# Altium PCB Super_Hornet.PcbDoc (part 3 of 4)
Units mil, origin at the board's own origin, x right, y up, seen from the top; angles counter-clockwise.
Board outline 6000 x 4000 mil, 2 copper layers (Top Layer, Bottom Layer); 166 components, 85 nets, 398 pads, 0 vias.
Unrouted connection lines stored in the file: 74.
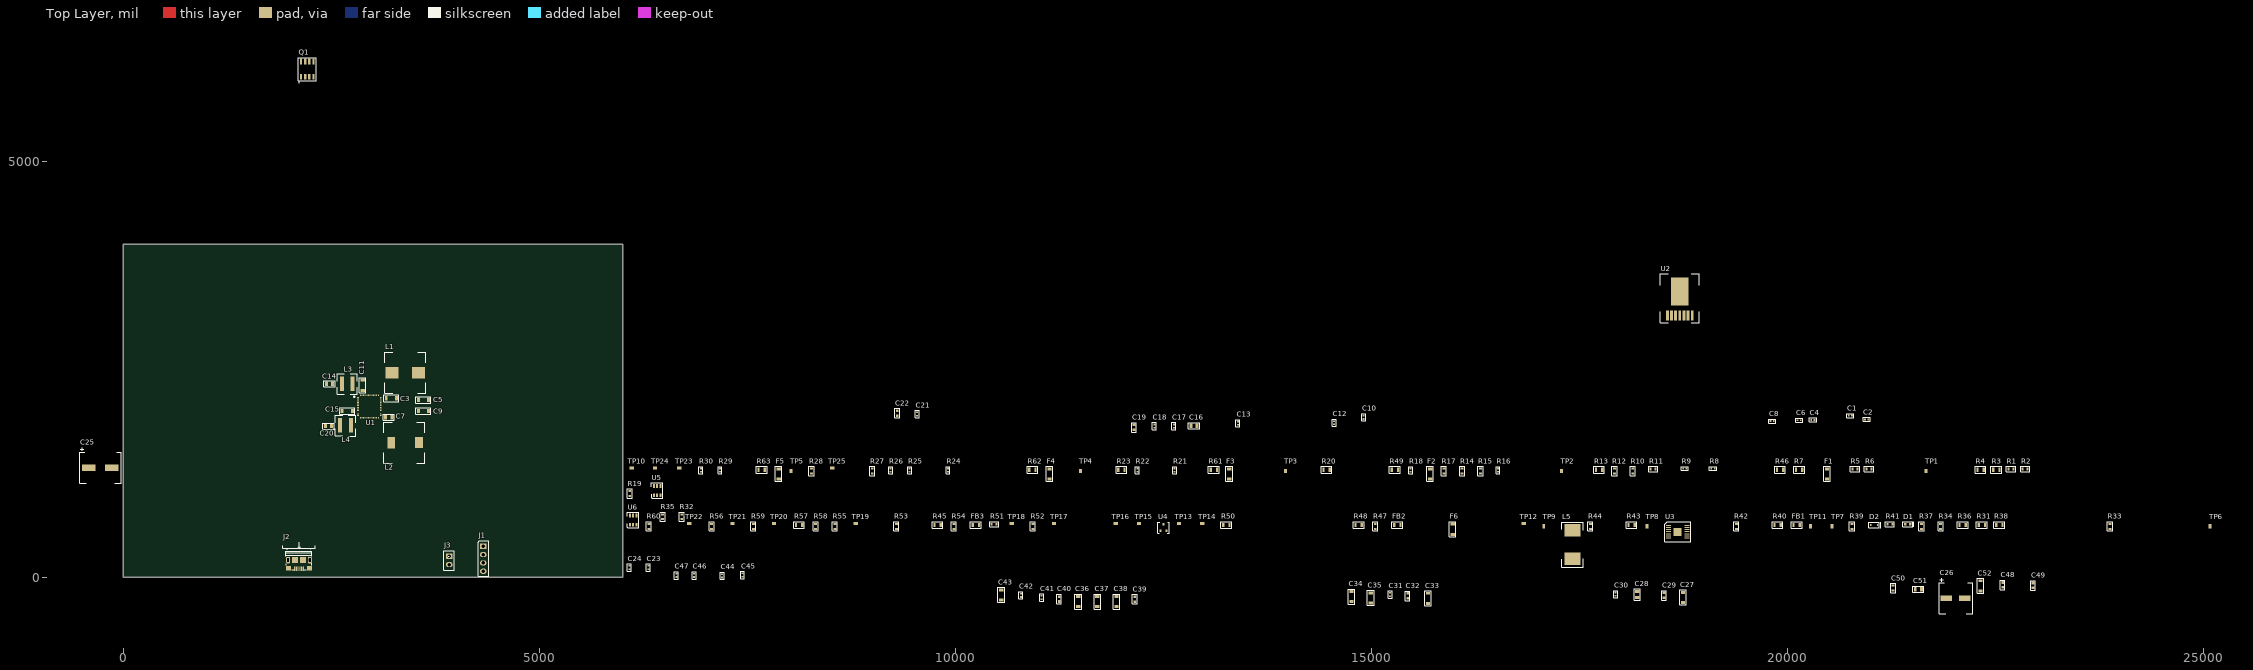
[diagram p0: Top Layer view]

## Part data (continued)
R12: "RES SMD 270 OHM 1% 1/10W 0603", Manufacturer=Panasonic, Rated Power="0.1 W", Resistance=270, Supplier Part Number 1=P270HCT-ND, Temp Coefficient="±100 ppm/°C", Tolerance (%)="±1 %", ComponentLink1Description=http://www.farnell.com/datasheets/1911175.pdf?src-supplier=Farnell, ComponentLink1URL=http://www.farnell.com/datasheets/1911175.pdf?src-supplier=Farnell, ComponentLink2Description=http://industrial.panasonic.com/www-data/pdf/AOA0000/AOA0000CE2.pdf?src-supplier=Avnet, ComponentLink2URL=http://industrial.panasonic.com/www-data/pdf/AOA0000/AOA0000CE2.pdf?src-supplier=Avnet, ComponentLink3Description=http://www.alliedelec.com/m/d/623f45ff1957d936ff56d46fd1c28cac.pdf?src-supplier=Allied+Electronics, ComponentLink3URL=http://www.alliedelec.com/m/d/623f45ff1957d936ff56d46fd1c28cac.pdf?src-supplier=Allied+Electronics, ComponentLink4Description=http://industrial.panasonic.com/www-data/pdf/AOA0000/AOA0000CE2.pdf?src-supplier=Avnet+Europe, ComponentLink4URL=http://industrial.panasonic.com/www-data/pdf/AOA0000/AOA0000CE2.pdf?src-supplier=Avnet+Europe, ComponentLink5Description=http://industrial.panasonic.com/www-data/pdf/AOA0000/AOA0000CE2.pdf?src-supplier=Element14, ComponentLink5URL=http://industrial.panasonic.com/www-data/pdf/AOA0000/AOA0000CE2.pdf?src-supplier=Element14, ComponentLink6Description=http://industrial.panasonic.com/www-data/pdf/AOA0000/AOA0000CE2.pdf?src-supplier=Future+Electronics, ComponentLink6URL=http://industrial.panasonic.com/www-data/pdf/AOA0000/AOA0000CE2.pdf?src-supplier=Future+Electronics, ComponentLink7Description=http://www.farnell.com/datasheets/1911175.pdf?src-supplier=Element14, ComponentLink7URL=http://www.farnell.com/datasheets/1911175.pdf?src-supplier=Element14, ComponentLink8Description=http://industrial.panasonic.com/www-data/pdf/AOA0000/AOA0000CE2.pdf?src-supplier=Avnet+Asia, ComponentLink8URL=http://industrial.panasonic.com/www-data/pdf/AOA0000/AOA0000CE2.pdf?src-supplier=Avnet+Asia, ComponentLink9Description=http://www.farnell.com/datasheets/1678782.pdf?src-supplier=Element14, ComponentLink9URL=http://www.farnell.com/datasheets/1678782.pdf?src-supplier=Element14, Manufacturer Part Number=ERJ-3EKF2700V, Pricing 1="1=0.1, 10=0.059, 100=0.0239, 1000=0.0107, 2500=0.0093 (USD)", Size Code=0603, Stock 1=101068, Supplier 1=Digi-Key
R13: "RES SMD 2.87K OHM 1% 1/8W 0805", Manufacturer=Yageo, Operating Temperature="-55°C ~ 155°C", Package / Case="0805 (2012 Metric)", Power (Watts)="0.125W, 1/8W", Resistance (Ohms)=2.87K, Standard Package=1, Supplier Device Package=0805, Supplier Part Number 1=311-2.87KCRCT-ND, Temperature Coefficient=±100ppm/°C, Tolerance=±1%, Catalog Drawings="Thick Film Resistor Side", Category=Resistors, ComponentLink1Description=http://www.yageo.ru/pdf/RC0805.pdf?src-supplier=Future+Electronics, ComponentLink1URL=http://www.yageo.ru/pdf/RC0805.pdf?src-supplier=Future+Electronics, ComponentLink2Description=http://www.yageo.com.tw/exep/pages/download/literatures/PYu-R_INT-thick_7.pdf?src-supplier=Digi-Key, ComponentLink2URL=http://www.yageo.com.tw/exep/pages/download/literatures/PYu-R_INT-thick_7.pdf?src-supplier=Digi-Key, ComponentLink3Description=http://www.yageo.com/documents/recent/PYu-RC_Group_51_RoHS_L_9.pdf?src-supplier=Digi-Key, ComponentLink3URL=http://www.yageo.com/documents/recent/PYu-RC_Group_51_RoHS_L_9.pdf?src-supplier=Digi-Key, Composition="Thick Film", EDA / CAD Models="Download from Accelerated Designs", Family="Chip Resistor - Surface Mount", Features="Moisture Resistant", Height="0.024\" (0.60mm)", HTML Datasheet="RC Series, L Suffix Datasheet.html", Kits="PHC4A-KIT-ND  - RES KIT 1K-9.76K 1/8W 5700PCS PHC4-KIT-ND  - RES KIT 1K-9.76K 1/8W 22800PCS", Manufacturer Part Number=RC0805FR-072K87L, Number of Terminations=2, Online Catalog="RC0805 Series", Other Names=311-2.87KCRCT, Packaging="Cut Tape (CT)", PCN Other="RC/AC 0603/0805/1206 22/Jan/2013", Pricing 1="1=0.1, 10=0.04, 100=0.0163, 1000=0.0073, 2500=0.0064 (USD)", Product Training Modules="Chip Resistor", Series=RC, Size / Dimension="0.079\" L x 0.049\" W (2.00mm x 1.25mm)", Stock 1=149027, Supplier 1=Digi-Key
R14: "RES SMD 301K OHM 1% 1/10W 0603", Manufacturer=Panasonic, Power Rating=100mW, Resistance=301K, Resistance Tolerance="± 1%", Resistor Case Style="0603 ^1608 Metric]", Resistor Element Type="Thick Film", Supplier Part Number 1=P301KHCT-ND, Temperature Coefficient="± 100ppm/°C", Voltage Rating=75V, ComponentLink1Description=http://www.jameco.com/Jameco/Products/ProdDS/1987951.pdf?src-supplier=Jameco, ComponentLink1URL=http://www.jameco.com/Jameco/Products/ProdDS/1987951.pdf?src-supplier=Jameco, ComponentLink2Description=http://industrial.panasonic.com/www-data/pdf/AOA0000/AOA0000CE2.pdf?src-supplier=Avnet, ComponentLink2URL=http://industrial.panasonic.com/www-data/pdf/AOA0000/AOA0000CE2.pdf?src-supplier=Avnet, ComponentLink3Description=https://www.alliedelec.com/m/d/623f45ff1957d936ff56d46fd1c28cac.pdf?src-supplier=Allied+Electronics, ComponentLink3URL=https://www.alliedelec.com/m/d/623f45ff1957d936ff56d46fd1c28cac.pdf?src-supplier=Allied+Electronics, ComponentLink4Description=http://www.farnell.com/datasheets/426256.pdf?src-supplier=Element14, ComponentLink4URL=http://www.farnell.com/datasheets/426256.pdf?src-supplier=Element14, ComponentLink5Description=http://www.farnell.com/datasheets/1678782.pdf?src-supplier=Element14, ComponentLink5URL=http://www.farnell.com/datasheets/1678782.pdf?src-supplier=Element14, ComponentLink6Description=http://www.farnell.com/datasheets/426256.pdf?src-supplier=Farnell, ComponentLink6URL=http://www.farnell.com/datasheets/426256.pdf?src-supplier=Farnell, ComponentLink7Description=http://www.mouser.com/ds/2/315/AOA0000C283-1093288.pdf?src-supplier=Mouser, ComponentLink7URL=http://www.mouser.com/ds/2/315/AOA0000C283-1093288.pdf?src-supplier=Mouser, Manufacturer Part Number=ERJ-3EKF3013V, Packaging="Full Reel", Pricing 1="1=0.1, 10=0.05, 100=0.0205, 1000=0.0092, 2500=0.008 (USD)", Product Range="PANASONIC - ERJ Series Thick Film Chip Resistors", Stock 1=56159, Supplier 1=Digi-Key, SVHC="To Be Advised"
R16: "RES SMD 73.2K OHM 1% 1/10W 0402", Manufacturer=Panasonic, Power Rating=100mW, Resistance=73.2K, Resistance Tolerance="± 1%", Resistor Case Style="0402 ^1005 Metric]", Resistor Element Type="Thick Film", Supplier Part Number 1=P73.2KLCT-ND, Temperature Coefficient="± 100ppm/°C", Voltage Rating=50V, ComponentLink1Description=https://www.alliedelec.com/m/d/623f45ff1957d936ff56d46fd1c28cac.pdf?src-supplier=Allied+Electronics, ComponentLink1URL=https://www.alliedelec.com/m/d/623f45ff1957d936ff56d46fd1c28cac.pdf?src-supplier=Allied+Electronics, ComponentLink2Description=http://www.mouser.com/ds/2/315/AOA0000CE2-37512.pdf?src-supplier=Mouser, ComponentLink2URL=http://www.mouser.com/ds/2/315/AOA0000CE2-37512.pdf?src-supplier=Mouser, ComponentLink3Description=http://www.farnell.com/datasheets/1678782.pdf?src-supplier=Element14, ComponentLink3URL=http://www.farnell.com/datasheets/1678782.pdf?src-supplier=Element14, ComponentLink4Description=http://www.industrial.panasonic.com/www-data/pdf/AOA0000/AOA0000CE2.pdf?src-supplier=Element14, ComponentLink4URL=http://www.industrial.panasonic.com/www-data/pdf/AOA0000/AOA0000CE2.pdf?src-supplier=Element14, ComponentLink5Description=http://www.farnell.com/datasheets/1911175.pdf?src-supplier=Farnell, ComponentLink5URL=http://www.farnell.com/datasheets/1911175.pdf?src-supplier=Farnell, Manufacturer Part Number=ERJ-2RKF7322X, Packaging="Full Reel", Pricing 1="1=0.1, 10=0.04, 100=0.0164, 1000=0.0074, 2500=0.0064, 5000=0.0053 (USD)", Product Range="PANASONIC - ERJ Series", Stock 1=75939, Supplier 1=Digi-Key, SVHC="To Be Advised"
R18: "RES SMD 13.7K OHM 1% 1/10W 0402", Case Code - in=0402, Case Code - mm=1005, Manufacturer=Panasonic, Operating Temperature Range="- 55 C to + 155 C", Package / Case="0402 (1005 metric)", Power Rating="100 mW", Resistance="13.7 K", Supplier Part Number 1=P13.7KLCT-ND, Temperature Coefficient="100 PPM / C", Tolerance="1 %", Voltage Rating="50 V", Brand=Panasonic, ComponentLink1Description=http://www.farnell.com/datasheets/1678782.pdf?src-supplier=Element14, ComponentLink1URL=http://www.farnell.com/datasheets/1678782.pdf?src-supplier=Element14, ComponentLink2Description=http://www.farnell.com/datasheets/1694929.pdf?src-supplier=Element14, ComponentLink2URL=http://www.farnell.com/datasheets/1694929.pdf?src-supplier=Element14, ComponentLink3Description=https://www.alliedelec.com/m/d/623f45ff1957d936ff56d46fd1c28cac.pdf?src-supplier=Allied+Electronics, ComponentLink3URL=https://www.alliedelec.com/m/d/623f45ff1957d936ff56d46fd1c28cac.pdf?src-supplier=Allied+Electronics, ComponentLink4Description=http://www.farnell.com/datasheets/1678782.pdf?src-supplier=Farnell, ComponentLink4URL=http://www.farnell.com/datasheets/1678782.pdf?src-supplier=Farnell, ComponentLink5Description=http://industrial.panasonic.com/www-data/pdf/AOA0000/AOA0000CE2.pdf?src-supplier=Avnet, ComponentLink5URL=http://industrial.panasonic.com/www-data/pdf/AOA0000/AOA0000CE2.pdf?src-supplier=Avnet, ComponentLink6Description=http://www.mouser.com/ds/2/315/AOA0000C304-1149620.pdf?src-supplier=Mouser, ComponentLink6URL=http://www.mouser.com/ds/2/315/AOA0000C304-1149620.pdf?src-supplier=Mouser, Factory Pack Quantity=10000, Height="0.35 mm", Length="1 mm", Manufacturer Part Number=ERJ-2RKF1372X, Packaging=Reel, Pricing 1="1=0.1, 10=0.043, 100=0.0173, 1000=0.0078, 2500=0.0068, 5000=0.0056 (USD)", Product="Thick Film Resistors SMD", Product Category="Thick Film Resistors", Qualification=AEC-Q200, RoHS=True, Series=ERJ, Stock 1=348733, Supplier 1=Digi-Key, Termination Style=SMD/SMT, Type="Precision Thick Film Resistors SMD", Unit Weight="0.000028 oz", Width="0.5 mm"
R19: "RES SMD 0.01 OHM 1% 1/4W 0603", Manufacturer=Panasonic, Operating Temperature="-55°C ~ 125°C", Package / Case="0603 (1608 Metric)", Power (Watts)="0.25W, 1/4W", Resistance (Ohms)=0.01, Supplier Device Package=0603, Supplier Part Number 1=P19180CT-ND, Temperature Coefficient="0/ +300ppm/°C", Tolerance=±1%, Category=Resistors, ComponentLink1Description=https://industrial.panasonic.com/cdbs/www-data/pdf/RDN0000/AOA0000C313.pdf?src-supplier=Digi-Key, ComponentLink1URL=https://industrial.panasonic.com/cdbs/www-data/pdf/RDN0000/AOA0000C313.pdf?src-supplier=Digi-Key, ComponentLink2Description=http://industrial.panasonic.com/lecs/www-data/pdf/AOA0000/AOA0000CE3.pdf?src-supplier=Digi-Key, ComponentLink2URL=http://industrial.panasonic.com/lecs/www-data/pdf/AOA0000/AOA0000CE3.pdf?src-supplier=Digi-Key, ComponentLink3Description=http://www.mouser.com/ds/2/315/AOA0000C295-1109214.pdf?src-supplier=Mouser, ComponentLink3URL=http://www.mouser.com/ds/2/315/AOA0000C295-1109214.pdf?src-supplier=Mouser, Composition="Thick Film", Family="Chip Resistor - Surface Mount", Features="Automotive AEC-Q200, Current Sense", Height="0.026\" (0.65mm)", Manufacturer Part Number=ERJ-3LWFR010V, Number of Terminations=2, Packaging="Tape & Reel (TR)", Pricing 1="1=0.48, 10=0.371, 100=0.156, 1000=0.0861, 2500=0.0807 (USD)", Series=ERJ, Size / Dimension="0.063\" L x 0.031\" W (1.60mm x 0.80mm)", Stock 1=48216, Supplier 1=Digi-Key
R20: "RES SMD 7.68K OHM 1% 1/8W 0805", Manufacturer=Panasonic, Operating Temperature="-55°C ~ 155°C", Package / Case="0805 (2012 Metric)", Power (Watts)="0.125W, 1/8W", Resistance (Ohms)=7.68K, Standard Package=1, Supplier Device Package=0805, Supplier Part Number 1=P7.68KCCT-ND, Temperature Coefficient=±100ppm/°C, Tolerance=±1%, Category=Resistors, ComponentLink1Description=http://www.mouser.com/ds/2/315/AOA0000C283-1093288.pdf?src-supplier=Mouser, ComponentLink1URL=http://www.mouser.com/ds/2/315/AOA0000C283-1093288.pdf?src-supplier=Mouser, ComponentLink2Description=https://www.alliedelec.com/m/d/623f45ff1957d936ff56d46fd1c28cac.pdf?src-supplier=Allied+Electronics, ComponentLink2URL=https://www.alliedelec.com/m/d/623f45ff1957d936ff56d46fd1c28cac.pdf?src-supplier=Allied+Electronics, ComponentLink3Description=http://www.farnell.com/datasheets/1678782.pdf?src-supplier=Farnell, ComponentLink3URL=http://www.farnell.com/datasheets/1678782.pdf?src-supplier=Farnell, ComponentLink4Description=http://industrial.panasonic.com/www-data/pdf/AOA0000/AOA0000CE2.pdf?src-supplier=Avnet, ComponentLink4URL=http://industrial.panasonic.com/www-data/pdf/AOA0000/AOA0000CE2.pdf?src-supplier=Avnet, ComponentLink5Description=http://www.farnell.com/datasheets/1694929.pdf?src-supplier=Element14, ComponentLink5URL=http://www.farnell.com/datasheets/1694929.pdf?src-supplier=Element14, Composition="Thick Film", EDA / CAD Models="Download from Accelerated Designs", Family="Chip Resistor - Surface Mount", Features="Automotive AEC-Q200", Height="0.028\" (0.70mm)", Kits="RSM3CA-ND  - RES KIT 1K-9.76K 1/8W 4800PCS RSM3C-ND  - RES KIT 1K-9.76K 1/8W 19200PCS", Manufacturer Part Number=ERJ-6ENF7681V, Number of Terminations=2, Online Catalog="ERJ Series", Other Names="ERJ-6ENF7681 ERJ6ENF7681 P7.68KCBK P7.68KCCT", Packaging="Cut Tape (CT)", Pricing 1="1=0.1, 10=0.072, 100=0.0275, 1000=0.0121, 2500=0.0105 (USD)", Series=ERJ, Size / Dimension="0.079\" L x 0.049\" W (2.00mm x 1.25mm)", Stock 1=41002, Supplier 1=Digi-Key
R21: "RES SMD 35.7K OHM 1% 1/10W 0402", Manufacturer=Panasonic, Power Rating=100mW, Resistance=35.7K, Resistance Tolerance="± 1%", Resistor Case Style="0402 [1005 Metric]", Resistor Element Material="Thick Film", Resistor Mounting=SMD, Resistor Terminals=Wraparound, Supplier Part Number 1=P35.7KLCT-ND, Temperature Coefficient="± 100ppm/°C", Voltage Rating=50V, ComponentLink1Description=http://industrial.panasonic.com/www-data/pdf/AOA0000/AOA0000CE2.pdf?src-supplier=Avnet, ComponentLink1URL=http://industrial.panasonic.com/www-data/pdf/AOA0000/AOA0000CE2.pdf?src-supplier=Avnet, ComponentLink2Description=http://www.mouser.com/ds/2/315/AOA0000C86-911473.pdf?src-supplier=Mouser, ComponentLink2URL=http://www.mouser.com/ds/2/315/AOA0000C86-911473.pdf?src-supplier=Mouser, ComponentLink3Description=http://www.industrial.panasonic.com/www-data/pdf/AOA0000/AOA0000CE2.pdf?src-supplier=Element14, ComponentLink3URL=http://www.industrial.panasonic.com/www-data/pdf/AOA0000/AOA0000CE2.pdf?src-supplier=Element14, ComponentLink4Description=https://www.alliedelec.com/m/d/623f45ff1957d936ff56d46fd1c28cac.pdf?src-supplier=Allied+Electronics, ComponentLink4URL=https://www.alliedelec.com/m/d/623f45ff1957d936ff56d46fd1c28cac.pdf?src-supplier=Allied+Electronics, ComponentLink5Description=http://www.farnell.com/datasheets/1694929.pdf?src-supplier=Element14, ComponentLink5URL=http://www.farnell.com/datasheets/1694929.pdf?src-supplier=Element14, Manufacturer Part Number=ERJ-2RKF3572X, MSL="(Not Applicable)", Packaging="Cut Tape", Pricing 1="1=0.1, 10=0.038, 100=0.0153, 1000=0.0069, 2500=0.006, 5000=0.0049 (USD)", Product Range="PANASONIC - ERJ Series", Resistor Element Type="Thick Film", Stock 1=130211, Supplier 1=Digi-Key, SVHC="Diboron trioxide (19-Dec-2012)", SVHC (Secondary)="Lead monoxide (lead oxide) (19-Dec-2012)"
R22 R26: "RES SMD 28.7K OHM 1% 1/16W 0402", Manufacturer=Vishay, Operating Temperature="-55°C ~ 155°C", Package / Case="0402 (1005 Metric)", Power (Watts)="0.063W, 1/16W", Resistance (Ohms)=28.7k, Standard Package=10, Supplier Part Number 1=541-28.7KLCT-ND, Temperature Coefficient=±100ppm/°C, Tolerance=±1%, Category=Resistors, ComponentLink1Description=http://www.farnell.com/datasheets/2111203.pdf?src-supplier=Element14, ComponentLink1URL=http://www.farnell.com/datasheets/2111203.pdf?src-supplier=Element14, ComponentLink2Description=http://uk.rs-online.com/webdocs/0d98/0900766b80d98824.pdf?src-supplier=RSComponents, ComponentLink2URL=http://uk.rs-online.com/webdocs/0d98/0900766b80d98824.pdf?src-supplier=RSComponents, ComponentLink3Description=https://www.alliedelec.com/m/d/0c934d6939ccefa68dbe0b96d821c8cf.pdf?src-supplier=Allied+Electronics, ComponentLink3URL=https://www.alliedelec.com/m/d/0c934d6939ccefa68dbe0b96d821c8cf.pdf?src-supplier=Allied+Electronics, ComponentLink4Description=http://www.farnell.com/datasheets/2045674.pdf?src-supplier=Element14, ComponentLink4URL=http://www.farnell.com/datasheets/2045674.pdf?src-supplier=Element14, ComponentLink5Description=http://www.vishay.com/docs/20035/dcrcwe3.pdf?src-supplier=Digi-Key, ComponentLink5URL=http://www.vishay.com/docs/20035/dcrcwe3.pdf?src-supplier=Digi-Key, ComponentLink6Description=http://www.vishay.com/docs/20035/dcrcwe3.pdf?src-supplier=Avnet+Europe, ComponentLink6URL=http://www.vishay.com/docs/20035/dcrcwe3.pdf?src-supplier=Avnet+Europe, ComponentLink7Description=http://www.farnell.com/datasheets/1697337.pdf?src-supplier=Element14, ComponentLink7URL=http://www.farnell.com/datasheets/1697337.pdf?src-supplier=Element14, ComponentLink8Description=http://www.vishay.com/docs/20035/dcrcwe3.pdf?src-supplier=Future+Electronics, ComponentLink8URL=http://www.vishay.com/docs/20035/dcrcwe3.pdf?src-supplier=Future+Electronics, Composition="Thick Film", EDA / CAD Models="Download from Accelerated Designs", Family="Chip Resistor - Surface Mount", Features="Automotive AEC-Q200", Height="0.016\" (0.40mm)", Kits="541-1418-ND  - RESISTOR KIT 0-1M 1/16W 12200PCS", Manufacturer Part Number=CRCW040228K7FKED, Number of Terminations=2, Online Catalog="CRCW - Automotive Series", Other Names=541-28.7KLCT, Packaging="Cut Tape (CT)", Pricing 1="1=0.1, 10=0.036, 100=0.0146, 1000=0.0066, 2500=0.0057, 5000=0.0047 (USD)", Series=CRCW, Size / Dimension="0.039\" L x 0.020\" W (1.00mm x 0.50mm)", Stock 1=9780, Supplier 1=Digi-Key, Supplier Device Package="0402 (1005 Metric)"
R23: "RES SMD 8.45K OHM 1% 1/8W 0805", Manufacturer=Panasonic, Power Rating=125mW, Resistance=8.45K, Resistance Tolerance="± 1%", Resistor Case Style="0805 ^2012 Metric]", Resistor Element Type="Thick Film", Supplier Part Number 1=P8.45KCCT-ND, Temperature Coefficient="± 100ppm/°C", Voltage Rating=150V, ComponentLink1Description=http://www.mouser.com/ds/2/315/AOA0000CE2-37512.pdf?src-supplier=Mouser, ComponentLink1URL=http://www.mouser.com/ds/2/315/AOA0000CE2-37512.pdf?src-supplier=Mouser, ComponentLink2Description=https://www.alliedelec.com/m/d/623f45ff1957d936ff56d46fd1c28cac.pdf?src-supplier=Allied+Electronics, ComponentLink2URL=https://www.alliedelec.com/m/d/623f45ff1957d936ff56d46fd1c28cac.pdf?src-supplier=Allied+Electronics, ComponentLink3Description=http://components.arrow.com/part/dataview/3985858S182954N1386?src-supplier=Arrow, ComponentLink3URL=http://components.arrow.com/part/dataview/3985858S182954N1386?src-supplier=Arrow, Manufacturer Part Number=ERJ-6ENF8451V, Packaging="Full Reel", Pricing 1="1=0.1, 10=0.072, 100=0.0275, 1000=0.0121, 2500=0.0105 (USD)", Product Range="PANASONIC - ERJ Series", Stock 1=16020, Supplier 1=Digi-Key, SVHC="To Be Advised"
R24: "RES SMD 68.1K OHM 1% 1/10W 0402", Manufacturer=Panasonic, Rated Power="0.1 W", Resistance=68.1K, Supplier Part Number 1=P68.1KLCT-ND, Temp Coefficient="±100 ppm/°C", Tolerance (%)="±1 %", ComponentLink1Description=http://www.farnell.com/datasheets/1678782.pdf?src-supplier=Element14, ComponentLink1URL=http://www.farnell.com/datasheets/1678782.pdf?src-supplier=Element14, ComponentLink2Description=http://industrial.panasonic.com/www-data/pdf/AOA0000/AOA0000CE2.pdf?src-supplier=Avnet, ComponentLink2URL=http://industrial.panasonic.com/www-data/pdf/AOA0000/AOA0000CE2.pdf?src-supplier=Avnet, ComponentLink3Description=https://www.alliedelec.com/m/d/623f45ff1957d936ff56d46fd1c28cac.pdf?src-supplier=Allied+Electronics, ComponentLink3URL=https://www.alliedelec.com/m/d/623f45ff1957d936ff56d46fd1c28cac.pdf?src-supplier=Allied+Electronics, ComponentLink4Description=http://industrial.panasonic.com/www-data/pdf/AOA0000/AOA0000CE2.pdf?src-supplier=Future+Electronics, ComponentLink4URL=http://industrial.panasonic.com/www-data/pdf/AOA0000/AOA0000CE2.pdf?src-supplier=Future+Electronics, ComponentLink5Description=http://www.farnell.com/datasheets/1694929.pdf?src-supplier=Element14, ComponentLink5URL=http://www.farnell.com/datasheets/1694929.pdf?src-supplier=Element14, Manufacturer Part Number=ERJ-2RKF6812X, Pricing 1="1=0.1, 10=0.04, 100=0.0164, 1000=0.0074, 2500=0.0064, 5000=0.0053 (USD)", Size Code=0402, Stock 1=216250, Supplier 1=Digi-Key
R25: "RES SMD 19.6K OHM 1% 1/10W 0402", Manufacturer=Panasonic, Power Rating=100mW, Resistance=19.6K, Resistance Tolerance="± 1%", Resistor Case Style="0402 [1005 Metric]", Resistor Element Material="Thick Film", Resistor Mounting=SMD, Resistor Terminals=Wraparound, Supplier Part Number 1=P19.6KLCT-ND, Temperature Coefficient="± 100ppm/°C", Voltage Rating=50V, ComponentLink1Description=http://www.mouser.com/ds/2/315/AOA0000C283-1093288.pdf?src-supplier=Mouser, ComponentLink1URL=http://www.mouser.com/ds/2/315/AOA0000C283-1093288.pdf?src-supplier=Mouser, ComponentLink2Description=http://industrial.panasonic.com/www-data/pdf/AOA0000/AOA0000CE2.pdf?src-supplier=Avnet, ComponentLink2URL=http://industrial.panasonic.com/www-data/pdf/AOA0000/AOA0000CE2.pdf?src-supplier=Avnet, ComponentLink3Description=https://www.alliedelec.com/m/d/623f45ff1957d936ff56d46fd1c28cac.pdf?src-supplier=Allied+Electronics, ComponentLink3URL=https://www.alliedelec.com/m/d/623f45ff1957d936ff56d46fd1c28cac.pdf?src-supplier=Allied+Electronics, ComponentLink4Description=http://www.farnell.com/datasheets/1911175.pdf?src-supplier=Element14, ComponentLink4URL=http://www.farnell.com/datasheets/1911175.pdf?src-supplier=Element14, ComponentLink5Description=http://www.farnell.com/datasheets/1694929.pdf?src-supplier=Element14, ComponentLink5URL=http://www.farnell.com/datasheets/1694929.pdf?src-supplier=Element14, ComponentLink6Description=http://www.farnell.com/datasheets/1911175.pdf?src-supplier=Farnell, ComponentLink6URL=http://www.farnell.com/datasheets/1911175.pdf?src-supplier=Farnell, Manufacturer Part Number=ERJ-2RKF1962X, MSL="(Not Applicable)", Packaging="Cut Tape", Pricing 1="1=0.1, 10=0.044, 100=0.018, 1000=0.0081, 2500=0.007, 5000=0.0058 (USD)", Product Range="PANASONIC - ERJ Series", Resistor Element Type="Thick Film", Stock 1=262661, Supplier 1=Digi-Key, SVHC="Diboron trioxide (19-Dec-2012)", SVHC (Secondary)="Lead monoxide (lead oxide) (19-Dec-2012)"
R29: "RES SMD 60.4K OHM 1% 1/10W 0402", Manufacturer=Panasonic, Power Rating=63mW, Resistance=60.4K, Resistance Tolerance="± 1%", Resistor Case Style="0402 ^1005 Metric]", Resistor Element Type="Thick Film", Supplier Part Number 1=P60.4KLCT-ND, Temperature Coefficient="± 100ppm/°C", Voltage Rating=50V, ComponentLink1Description=http://www.farnell.com/datasheets/1911175.pdf?src-supplier=Farnell, ComponentLink1URL=http://www.farnell.com/datasheets/1911175.pdf?src-supplier=Farnell, ComponentLink2Description=http://industrial.panasonic.com/www-data/pdf/AOA0000/AOA0000CE2.pdf?src-supplier=Avnet, ComponentLink2URL=http://industrial.panasonic.com/www-data/pdf/AOA0000/AOA0000CE2.pdf?src-supplier=Avnet, ComponentLink3Description=http://industrial.panasonic.com/www-data/pdf/AOA0000/AOA0000CE2.pdf?src-supplier=Avnet+Asia, ComponentLink3URL=http://industrial.panasonic.com/www-data/pdf/AOA0000/AOA0000CE2.pdf?src-supplier=Avnet+Asia, ComponentLink4Description=https://www.alliedelec.com/m/d/623f45ff1957d936ff56d46fd1c28cac.pdf?src-supplier=Allied+Electronics, ComponentLink4URL=https://www.alliedelec.com/m/d/623f45ff1957d936ff56d46fd1c28cac.pdf?src-supplier=Allied+Electronics, ComponentLink5Description=http://www.farnell.com/datasheets/1678782.pdf?src-supplier=Element14, ComponentLink5URL=http://www.farnell.com/datasheets/1678782.pdf?src-supplier=Element14, ComponentLink6Description=http://www.mouser.com/ds/2/315/AOA0000C283-1093288.pdf?src-supplier=Mouser, ComponentLink6URL=http://www.mouser.com/ds/2/315/AOA0000C283-1093288.pdf?src-supplier=Mouser, ComponentLink7Description=http://www.farnell.com/datasheets/1911175.pdf?src-supplier=Element14, ComponentLink7URL=http://www.farnell.com/datasheets/1911175.pdf?src-supplier=Element14, ComponentLink8Description=http://industrial.panasonic.com/cdbs/www-data/pdf/RDA0000/AOA0000C304.pdf?src-supplier=Farnell, ComponentLink8URL=http://industrial.panasonic.com/cdbs/www-data/pdf/RDA0000/AOA0000C304.pdf?src-supplier=Farnell, Manufacturer Part Number=ERJ-2RKF6042X, Packaging="Full Reel", Pricing 1="1=0.1, 10=0.04, 100=0.0163, 1000=0.0073, 2500=0.0064, 5000=0.0053 (USD)", Product Range="PANASONIC - ERJ Series Thick Film Chip Resistors", Stock 1=597601, Supplier 1=Digi-Key, SVHC="To Be Advised"
R30: "RES SMD 23.2K OHM 1% 1/10W 0402", Manufacturer=Panasonic, Operating Temperature="-55°C ~ 155°C", Package / Case="0402 (1005 Metric)", Power (Watts)="0.1W, 1/10W", Resistance (Ohms)=23.2k, Standard Package=1, Supplier Device Package=0402, Supplier Part Number 1=P23.2KLCT-ND, Temperature Coefficient=±100ppm/°C, Tolerance=±1%, Category=Resistors, ComponentLink1Description=https://www.alliedelec.com/m/d/623f45ff1957d936ff56d46fd1c28cac.pdf?src-supplier=Allied+Electronics, ComponentLink1URL=https://www.alliedelec.com/m/d/623f45ff1957d936ff56d46fd1c28cac.pdf?src-supplier=Allied+Electronics, ComponentLink2Description=http://www.farnell.com/datasheets/1911175.pdf?src-supplier=Farnell, ComponentLink2URL=http://www.farnell.com/datasheets/1911175.pdf?src-supplier=Farnell, ComponentLink3Description=http://www.farnell.com/datasheets/1678782.pdf?src-supplier=Element14, ComponentLink3URL=http://www.farnell.com/datasheets/1678782.pdf?src-supplier=Element14, ComponentLink4Description=http://www.mouser.com/ds/2/315/AOA0000C283-1093288.pdf?src-supplier=Mouser, ComponentLink4URL=http://www.mouser.com/ds/2/315/AOA0000C283-1093288.pdf?src-supplier=Mouser, Composition="Thick Film", EDA / CAD Models="Download from Accelerated Designs", Family="Chip Resistor - Surface Mount", Features="Automotive AEC-Q200", Height="0.016\" (0.40mm)", Kits="RSM4L-ND  - RES KIT 10K-97.6K 1/10W 4800PCS", Manufacturer Part Number=ERJ-2RKF2322X, Number of Terminations=2, Online Catalog="ERJ Series", Other Names="ERJ-2RKF2322 ERJ2RKF2322 P23.2KLCT", Packaging="Cut Tape (CT)", Pricing 1="1=0.1, 10=0.047, 100=0.0192, 1000=0.0086, 2500=0.0075, 5000=0.0062 (USD)", Series=ERJ, Size / Dimension="0.039\" L x 0.020\" W (1.00mm x 0.50mm)", Stock 1=325477, Supplier 1=Digi-Key
R31 R40 R43 R45 R46 R48 R49 R50 R61 R62 R63: "RES SMD 0 OHM JUMPER 1/8W 0805", Case Size="0805 (2012 Metric)", Manufacturer=Panasonic, Operating Temp Range="-55 to +155 °C", Rated Current="2 A", Rated Power="0.125 W", Resistance="0 O", Supplier Part Number 1=P0.0ACT-ND, ComponentLink1Description=http://www.farnell.com/datasheets/1678796.pdf?src-supplier=Element14, ComponentLink1URL=http://www.farnell.com/datasheets/1678796.pdf?src-supplier=Element14, ComponentLink2Description=http://industrial.panasonic.com/cdbs/www-data/pdf/RDA0000/AOA0000C301.pdf?src-supplier=Farnell, ComponentLink2URL=http://industrial.panasonic.com/cdbs/www-data/pdf/RDA0000/AOA0000C301.pdf?src-supplier=Farnell, ComponentLink3Description=http://industrial.panasonic.com/www-data/pdf/AOA0000/AOA0000CE1.pdf?src-supplier=Avnet, ComponentLink3URL=http://industrial.panasonic.com/www-data/pdf/AOA0000/AOA0000CE1.pdf?src-supplier=Avnet, ComponentLink4Description=http://industrial.panasonic.com/www-cgi/jvcr13pz.cgi?E+PZ+3+AOA0001+ERJ6GEY0R00V+7+WW?src-supplier=Jameco, ComponentLink4URL=http://industrial.panasonic.com/www-cgi/jvcr13pz.cgi?E+PZ+3+AOA0001+ERJ6GEY0R00V+7+WW?src-supplier=Jameco, ComponentLink5Description=http://industrial.panasonic.com/www-data/pdf/AOA0000/AOA0000CE1.pdf?src-supplier=Avnet+Europe, ComponentLink5URL=http://industrial.panasonic.com/www-data/pdf/AOA0000/AOA0000CE1.pdf?src-supplier=Avnet+Europe, ComponentLink6Description=http://industrial.panasonic.com/www-data/pdf/AOA0000/AOA0000CE1.pdf?src-supplier=Avnet+Asia, ComponentLink6URL=http://industrial.panasonic.com/www-data/pdf/AOA0000/AOA0000CE1.pdf?src-supplier=Avnet+Asia, Dimension="2 x 1.25 mm", Height - Max="0.7 mm", Manufacturer Part Number=ERJ-6GEY0R00V, No. of Terminations=2, Pricing 1="1=0.1, 10=0.054, 25=0.0392, 50=0.03, 100=0.0221, 250=0.0168, 500=0.0135, 1000=0.0099 (USD)", Stock 1=1318594, Supplier 1=Digi-Key, Technology="Thick Film"
R32: "RES SMD 42.2K OHM 1% 1/10W 0603", Manufacturer=Panasonic, Operating Temperature="-55°C ~ 155°C", Package / Case="0603 (1608 Metric)", Power (Watts)="0.1W, 1/10W", Resistance (Ohms)=42.2K, Standard Package=1, Supplier Device Package=0603, Supplier Part Number 1=P42.2KHCT-ND, Temperature Coefficient=±100ppm/°C, Tolerance=±1%, Category=Resistors, ComponentLink1Description=http://www.farnell.com/datasheets/1678782.pdf?src-supplier=Element14, ComponentLink1URL=http://www.farnell.com/datasheets/1678782.pdf?src-supplier=Element14, ComponentLink2Description=http://www.farnell.com/datasheets/1911175.pdf?src-supplier=Farnell, ComponentLink2URL=http://www.farnell.com/datasheets/1911175.pdf?src-supplier=Farnell, ComponentLink3Description=http://industrial.panasonic.com/www-data/pdf/AOA0000/AOA0000CE2.pdf?src-supplier=Avnet+Europe, ComponentLink3URL=http://industrial.panasonic.com/www-data/pdf/AOA0000/AOA0000CE2.pdf?src-supplier=Avnet+Europe, ComponentLink4Description=https://www.alliedelec.com/m/d/623f45ff1957d936ff56d46fd1c28cac.pdf?src-supplier=Allied+Electronics, ComponentLink4URL=https://www.alliedelec.com/m/d/623f45ff1957d936ff56d46fd1c28cac.pdf?src-supplier=Allied+Electronics, ComponentLink5Description=http://industrial.panasonic.com/www-data/pdf/AOA0000/AOA0000CE2.pdf?src-supplier=Avnet+Asia, ComponentLink5URL=http://industrial.panasonic.com/www-data/pdf/AOA0000/AOA0000CE2.pdf?src-supplier=Avnet+Asia, ComponentLink6Description=http://industrial.panasonic.com/www-data/pdf/AOA0000/AOA0000CE2.pdf?src-supplier=Avnet, ComponentLink6URL=http://industrial.panasonic.com/www-data/pdf/AOA0000/AOA0000CE2.pdf?src-supplier=Avnet, ComponentLink7Description=http://www.mouser.com/ds/2/315/AOA0000C283-1093288.pdf?src-supplier=Mouser, ComponentLink7URL=http://www.mouser.com/ds/2/315/AOA0000C283-1093288.pdf?src-supplier=Mouser, ComponentLink8Description=http://www.farnell.com/datasheets/426256.pdf?src-supplier=Element14, ComponentLink8URL=http://www.farnell.com/datasheets/426256.pdf?src-supplier=Element14, Composition="Thick Film", EDA / CAD Models="Download from Accelerated Designs", Family="Chip Resistor - Surface Mount", Features="Automotive AEC-Q200", Height="0.022\" (0.55mm)", Kits="RSM4H-ND  - RES KIT 10K-97.6K 1/10W 4800PCS", Manufacturer Part Number=ERJ-3EKF4222V, Number of Terminations=2, Online Catalog="ERJ Series", Other Names="ERJ-3EKF4222 ERJ3EKF4222 P42.2KHCT", Packaging="Cut Tape (CT)", Pricing 1="1=0.1, 10=0.032, 100=0.013, 1000=0.0058, 2500=0.0051 (USD)", Series=ERJ, Size / Dimension="0.063\" L x 0.031\" W (1.60mm x 0.80mm)", Stock 1=6649, Supplier 1=Digi-Key
R33: "RES SMD 1K OHM 0.1% 1/10W 0603", Manufacturer=Panasonic, Operating Temperature Max=155°C, Operating Temperature Min=-55°C, Operating Temperature Range="-55°C to +155°C", Package / Case=0603, Power Rating=100mW, Resistance=1K, Resistance Tolerance="± 0.1%", Resistor Case Style="0603 [1608 Metric]", Resistor Element Material="Thin Film", Resistor Mounting=SMD, Supplier Part Number 1=P1.0KDBCT-ND, Temperature Coefficient="± 25ppm/°C", Voltage Rating=75V, ComponentLink1Description=http://uk.rs-online.com/webdocs/148c/0900766b8148c48a.pdf?src-supplier=RSComponents, ComponentLink1URL=http://uk.rs-online.com/webdocs/148c/0900766b8148c48a.pdf?src-supplier=RSComponents, ComponentLink2Description=https://industrial.panasonic.com/cdbs/www-data/pdf/RDM0000/AOA0000C307.pdf?src-supplier=Mouser, ComponentLink2URL=https://industrial.panasonic.com/cdbs/www-data/pdf/RDM0000/AOA0000C307.pdf?src-supplier=Mouser, ComponentLink3Description=https://industrial.panasonic.com/cdbs/www-data/pdf/RDM0000/AOA0000C307.pdf?src-supplier=Distrelec, ComponentLink3URL=https://industrial.panasonic.com/cdbs/www-data/pdf/RDM0000/AOA0000C307.pdf?src-supplier=Distrelec, ComponentLink4Description=http://www.alliedelec.com/m/d/b6b0537e86f421aa7f5975bb1d8f429a.pdf?src-supplier=Allied+Electronics, ComponentLink4URL=http://www.alliedelec.com/m/d/b6b0537e86f421aa7f5975bb1d8f429a.pdf?src-supplier=Allied+Electronics, ComponentLink5Description=http://www.farnell.com/datasheets/2059650.pdf?src-supplier=Element14, ComponentLink5URL=http://www.farnell.com/datasheets/2059650.pdf?src-supplier=Element14, ComponentLink6Description=http://www.farnell.com/datasheets/485442.pdf?src-supplier=Element14, ComponentLink6URL=http://www.farnell.com/datasheets/485442.pdf?src-supplier=Element14, ComponentLink7Description=http://industrial.panasonic.com/www-data/pdf/AOA0000/AOA0000CE26.pdf?src-supplier=Future+Electronics, ComponentLink7URL=http://industrial.panasonic.com/www-data/pdf/AOA0000/AOA0000CE26.pdf?src-supplier=Future+Electronics, ComponentLink8Description=http://www.farnell.com/datasheets/2052875.pdf?src-supplier=Farnell, ComponentLink8URL=http://www.farnell.com/datasheets/2052875.pdf?src-supplier=Farnell, ComponentLink9Description=https://industrial.panasonic.com/cdbs/www-data/pdf/RDM0000/AOA0000C307.pdf?src-supplier=Avnet, ComponentLink9URL=https://industrial.panasonic.com/cdbs/www-data/pdf/RDM0000/AOA0000C307.pdf?src-supplier=Avnet, ComponentLink10Description=http://www.farnell.com/datasheets/485442.pdf?src-supplier=Farnell, ComponentLink10URL=http://www.farnell.com/datasheets/485442.pdf?src-supplier=Farnell, ComponentLink11Description=http://industrial.panasonic.com/www-data/pdf/AOA0000/AOA0000CE26.pdf?src-supplier=Avnet+Europe, ComponentLink11URL=http://industrial.panasonic.com/www-data/pdf/AOA0000/AOA0000CE26.pdf?src-supplier=Avnet+Europe, ComponentLink12Description=http://www.produktinfo.conrad.com/datenblaetter/450000-474999/450752-da-01-en-WIDERSTAND_0603_ERA.pdf?src-supplier=Conrad, ComponentLink12URL=http://www.produktinfo.conrad.com/datenblaetter/450000-474999/450752-da-01-en-WIDERSTAND_0603_ERA.pdf?src-supplier=Conrad, Manufacturer Part Number=ERA-3AEB102V, No. of Pins=2, Packaging=Reel, Pricing 1="1=0.34, 10=0.286, 100=0.1116, 1000=0.0467, 2500=0.0428 (USD)", Product Range="PANASONIC - ERA Series Metal Film Chip Resistor", Reel Quantity=5000, Resistor Element Type="Thin Film", Series=ERA, Stock 1=455914, Supplier 1=Digi-Key, SVHC="No SVHC (16-Jun-2014)"
R34 R59 R60: "RES SMD 100 OHM 1% 1/10W 0603", Manufacturer=Panasonic, Rated Power="0.1 W", Resistance=100, Supplier Part Number 1=P100HCT-ND, Temp Coefficient="±100 ppm/°C", Tolerance (%)="±1 %", ComponentLink1Description=http://industrial.panasonic.com/www-data/pdf/AOA0000/AOA0000CE2.pdf?src-supplier=Avnet, ComponentLink1URL=http://industrial.panasonic.com/www-data/pdf/AOA0000/AOA0000CE2.pdf?src-supplier=Avnet, ComponentLink2Description=http://www.alliedelec.com/m/d/623f45ff1957d936ff56d46fd1c28cac.pdf?src-supplier=Allied+Electronics, ComponentLink2URL=http://www.alliedelec.com/m/d/623f45ff1957d936ff56d46fd1c28cac.pdf?src-supplier=Allied+Electronics, ComponentLink3Description=http://industrial.panasonic.com/cdbs/www-data/pdf/RDA0000/AOA0000C304.pdf?src-supplier=Element14, ComponentLink3URL=http://industrial.panasonic.com/cdbs/www-data/pdf/RDA0000/AOA0000C304.pdf?src-supplier=Element14, ComponentLink4Description=http://industrial.panasonic.com/www-data/pdf/AOA0000/AOA0000CE2.pdf?src-supplier=Element14, ComponentLink4URL=http://industrial.panasonic.com/www-data/pdf/AOA0000/AOA0000CE2.pdf?src-supplier=Element14, ComponentLink5Description=http://www.mouser.com/ds/2/315/AOA0000C86-911473.pdf?src-supplier=Mouser, ComponentLink5URL=http://www.mouser.com/ds/2/315/AOA0000C86-911473.pdf?src-supplier=Mouser, ComponentLink6Description=http://www.jameco.com/Jameco/Products/ProdDS/1987450.pdf?src-supplier=Jameco, ComponentLink6URL=http://www.jameco.com/Jameco/Products/ProdDS/1987450.pdf?src-supplier=Jameco, ComponentLink7Description=http://industrial.panasonic.com/www-data/pdf/AOA0000/AOA0000CE2.pdf?src-supplier=Avnet+Europe, ComponentLink7URL=http://industrial.panasonic.com/www-data/pdf/AOA0000/AOA0000CE2.pdf?src-supplier=Avnet+Europe, ComponentLink8Description=http://www.farnell.com/datasheets/1678782.pdf?src-supplier=Element14, ComponentLink8URL=http://www.farnell.com/datasheets/1678782.pdf?src-supplier=Element14, Manufacturer Part Number=ERJ3EKF1000V, Pricing 1="1=0.1, 10=0.065, 100=0.0266, 1000=0.0119, 2500=0.0104 (USD)", Size Code=0603, Stock 1=1061558, Supplier 1=Digi-Key
R35: "RES SMD 12.7K OHM 1% 1/10W 0603", Manufacturer=Panasonic, Rated Power="0.1 W", Resistance=12.7K, Supplier Part Number 1=P12.7KHCT-ND, Temp Coefficient="±100 ppm/°C", Tolerance (%)="±1 %", ComponentLink1Description=http://www.farnell.com/datasheets/1678782.pdf?src-supplier=Element14, ComponentLink1URL=http://www.farnell.com/datasheets/1678782.pdf?src-supplier=Element14, ComponentLink2Description=http://www.farnell.com/datasheets/426256.pdf?src-supplier=Element14, ComponentLink2URL=http://www.farnell.com/datasheets/426256.pdf?src-supplier=Element14, ComponentLink3Description=http://www.alliedelec.com/m/d/623f45ff1957d936ff56d46fd1c28cac.pdf?src-supplier=Allied+Electronics, ComponentLink3URL=http://www.alliedelec.com/m/d/623f45ff1957d936ff56d46fd1c28cac.pdf?src-supplier=Allied+Electronics, ComponentLink4Description=http://industrial.panasonic.com/www-data/pdf/AOA0000/AOA0000CE2.pdf?src-supplier=Avnet, ComponentLink4URL=http://industrial.panasonic.com/www-data/pdf/AOA0000/AOA0000CE2.pdf?src-supplier=Avnet, Manufacturer Part Number=ERJ-3EKF1272V, Pricing 1="1=0.1, 10=0.032, 100=0.013, 1000=0.0058, 2500=0.0051 (USD)", Size Code=0603, Stock 1=278983, Supplier 1=Digi-Key
R36: "RES SMD 1.07K OHM 1% 1/8W 0805", Manufacturer=Panasonic, Operating Temperature="-55°C ~ 155°C", Package / Case="0805 (2012 Metric)", Power (Watts)="0.125W, 1/8W", Resistance (Ohms)=1.07K, Standard Package=1, Supplier Device Package=0805, Supplier Part Number 1=P1.07KCCT-ND, Temperature Coefficient=±100ppm/°C, Tolerance=±1%, Category=Resistors, ComponentLink1Description=http://industrial.panasonic.com/www-data/pdf/AOA0000/AOA0000CE2.pdf?src-supplier=Avnet, ComponentLink1URL=http://industrial.panasonic.com/www-data/pdf/AOA0000/AOA0000CE2.pdf?src-supplier=Avnet, ComponentLink2Description=http://www.mouser.com/ds/2/315/AOA0000C283-1093288.pdf?src-supplier=Mouser, ComponentLink2URL=http://www.mouser.com/ds/2/315/AOA0000C283-1093288.pdf?src-supplier=Mouser, Composition="Thick Film", EDA / CAD Models="Download from Accelerated Designs", Family="Chip Resistor - Surface Mount", Features="Automotive AEC-Q200", Height="0.028\" (0.70mm)", Kits="RSM3CA-ND  - RES KIT 1K-9.76K 1/8W 4800PCS RSM3C-ND  - RES KIT 1K-9.76K 1/8W 19200PCS", Manufacturer Part Number=ERJ-6ENF1071V, Number of Terminations=2, Online Catalog="ERJ Series", Other Names="ERJ-6ENF1071 ERJ6ENF1071 P1.07KCBK P1.07KCCT", Packaging="Cut Tape (CT)", Pricing 1="1=0.1, 10=0.072, 100=0.0275, 1000=0.0121, 2500=0.0105 (USD)", Series=ERJ, Size / Dimension="0.079\" L x 0.049\" W (2.00mm x 1.25mm)", Stock 1=40812, Supplier 1=Digi-Key
R37: library part ERJ-3LWFR005V, Manufacturer=Panasonic, Operating Temperature="-55°C ~ 125°C", Package / Case="0603 (1608 Metric)", Power (Watts)="0.25W, 1/4W", Resistance (Ohms)=0.005, Supplier Device Package=0603, Supplier Part Number 1=P19182CT-ND, Temperature Coefficient="0/ +700ppm/°C", Tolerance=±1%, Category=Resistors, ComponentLink1Description=http://www.mouser.com/ds/2/315/AOA0000C295-1109214.pdf?src-supplier=Mouser, ComponentLink1URL=http://www.mouser.com/ds/2/315/AOA0000C295-1109214.pdf?src-supplier=Mouser, ComponentLink2Description=https://industrial.panasonic.com/cdbs/www-data/pdf/RDN0000/AOA0000C313.pdf?src-supplier=Digi-Key, ComponentLink2URL=https://industrial.panasonic.com/cdbs/www-data/pdf/RDN0000/AOA0000C313.pdf?src-supplier=Digi-Key, ComponentLink3Description=http://www.farnell.com/datasheets/2631545.pdf?src-supplier=Farnell, ComponentLink3URL=http://www.farnell.com/datasheets/2631545.pdf?src-supplier=Farnell, ComponentLink4Description=http://www.farnell.com/datasheets/2631545.pdf?src-supplier=Newark, ComponentLink4URL=http://www.farnell.com/datasheets/2631545.pdf?src-supplier=Newark, Composition="Thick Film", Family="Chip Resistor - Surface Mount", Features="Automotive AEC-Q200, Current Sense", Height="0.026\" (0.65mm)", Manufacturer Part Number=ERJ-3LWFR005V, Number of Terminations=2, Packaging="Tape & Reel (TR)", Pricing 1="1=0.51, 10=0.39, 25=0.2964, 50=0.2202, 100=0.1638, 250=0.1384, 500=0.1186, 1000=0.0904 (USD)", Series=ERJ, Size / Dimension="0.063\" L x 0.031\" W (1.60mm x 0.80mm)", Stock 1=76322, Supplier 1=Digi-Key
R38: "RES SMD 5.62K OHM 1% 1/8W 0805", Manufacturer=Panasonic, Power Rating=125mW, Resistance=5.62K, Resistance Tolerance="± 1%", Resistor Case Style="0805 [2012 Metric]", Resistor Element Material="Thick Film", Resistor Mounting=SMD, Supplier Part Number 1=P5.62KCCT-ND, Temperature Coefficient="± 100ppm/°C", Voltage Rating=150V, ComponentLink1Description=http://industrial.panasonic.com/www-data/pdf/AOA0000/AOA0000CE2.pdf?src-supplier=Avnet, ComponentLink1URL=http://industrial.panasonic.com/www-data/pdf/AOA0000/AOA0000CE2.pdf?src-supplier=Avnet, ComponentLink2Description=http://www.farnell.com/datasheets/426256.pdf?src-supplier=Element14, ComponentLink2URL=http://www.farnell.com/datasheets/426256.pdf?src-supplier=Element14, ComponentLink3Description=http://www.farnell.com/datasheets/1911175.pdf?src-supplier=Farnell, ComponentLink3URL=http://www.farnell.com/datasheets/1911175.pdf?src-supplier=Farnell, ComponentLink4Description=http://industrial.panasonic.com/www-data/pdf/AOA0000/AOA0000CE2.pdf?src-supplier=Avnet+Europe, ComponentLink4URL=http://industrial.panasonic.com/www-data/pdf/AOA0000/AOA0000CE2.pdf?src-supplier=Avnet+Europe, ComponentLink5Description=http://www.farnell.com/datasheets/1678782.pdf?src-supplier=Element14, ComponentLink5URL=http://www.farnell.com/datasheets/1678782.pdf?src-supplier=Element14, Manufacturer Part Number=ERJ-6ENF5621V, MSL="(Not Applicable)", Packaging="Cut Tape", Pricing 1="1=0.1, 10=0.072, 100=0.0275, 1000=0.0121, 2500=0.0105 (USD)", Product Range="PANASONIC - ERJ Series", Resistor Element Type="Thick Film", Stock 1=24844, Supplier 1=Digi-Key, SVHC="Diboron trioxide (19-Dec-2012)", SVHC (Secondary)="Lead monoxide (lead oxide) (19-Dec-2012)"
R39: "RES SMD 22.1K OHM 1% 1/10W 0603", Manufacturer=Panasonic, Rated Power="0.1 W", Resistance="22.1 K", Supplier Part Number 1=P22.1KHCT-ND, Temp Coefficient="±100 ppm/°C", Tolerance (%)="±1 %", ComponentLink1Description=http://industrial.panasonic.com/cdbs/www-data/pdf/RDA0000/AOA0000C304.pdf?src-supplier=Farnell, ComponentLink1URL=http://industrial.panasonic.com/cdbs/www-data/pdf/RDA0000/AOA0000C304.pdf?src-supplier=Farnell, ComponentLink2Description=http://www.mouser.com/ds/2/315/AOA0000C283-1093288.pdf?src-supplier=Mouser, ComponentLink2URL=http://www.mouser.com/ds/2/315/AOA0000C283-1093288.pdf?src-supplier=Mouser, ComponentLink3Description=http://www.farnell.com/datasheets/1678782.pdf?src-supplier=Element14, ComponentLink3URL=http://www.farnell.com/datasheets/1678782.pdf?src-supplier=Element14, ComponentLink4Description=http://industrial.panasonic.com/www-data/pdf/AOA0000/AOA0000CE2.pdf?src-supplier=Future+Electronics, ComponentLink4URL=http://industrial.panasonic.com/www-data/pdf/AOA0000/AOA0000CE2.pdf?src-supplier=Future+Electronics, ComponentLink5Description=http://industrial.panasonic.com/www-data/pdf/AOA0000/AOA0000CE2.pdf?src-supplier=Avnet+Europe, ComponentLink5URL=http://industrial.panasonic.com/www-data/pdf/AOA0000/AOA0000CE2.pdf?src-supplier=Avnet+Europe, ComponentLink6Description=http://industrial.panasonic.com/www-data/pdf/AOA0000/AOA0000CE2.pdf?src-supplier=Avnet, ComponentLink6URL=http://industrial.panasonic.com/www-data/pdf/AOA0000/AOA0000CE2.pdf?src-supplier=Avnet, ComponentLink7Description=https://www.alliedelec.com/m/d/623f45ff1957d936ff56d46fd1c28cac.pdf?src-supplier=Allied+Electronics, ComponentLink7URL=https://www.alliedelec.com/m/d/623f45ff1957d936ff56d46fd1c28cac.pdf?src-supplier=Allied+Electronics, ComponentLink8Description=http://www.jameco.com/Jameco/Products/ProdDS/1987775.pdf?src-supplier=Jameco, ComponentLink8URL=http://www.jameco.com/Jameco/Products/ProdDS/1987775.pdf?src-supplier=Jameco, ComponentLink9Description=http://industrial.panasonic.com/cdbs/www-data/pdf/RDA0000/AOA0000C304.pdf?src-supplier=Element14, ComponentLink9URL=http://industrial.panasonic.com/cdbs/www-data/pdf/RDA0000/AOA0000C304.pdf?src-supplier=Element14, Manufacturer Part Number=ERJ-3EKF2212V, Pricing 1="1=0.1, 10=0.064, 100=0.0258, 1000=0.0116, 2500=0.0101 (USD)", Size Code=0603, Stock 1=927679, Supplier 1=Digi-Key
R41: "RES SMD 1.5K OHM ±1% 1/10W 0603", Case Code - in=0603, Case Code - mm=1608, Manufacturer=Panasonic, Operating Temperature Range="- 55 C to + 155 C", Package / Case="0603 (1608 metric)", Power Rating="100 mW", Resistance=1.5K, Supplier Part Number 1=P1.50KHCT-ND, Temperature Coefficient="100 PPM / C", Tolerance="1 %", Voltage Rating="75 V", Brand=Panasonic, ComponentLink1Description=http://www.farnell.com/datasheets/426256.pdf?src-supplier=Element14, ComponentLink1URL=http://www.farnell.com/datasheets/426256.pdf?src-supplier=Element14, ComponentLink2Description=http://industrial.panasonic.com/www-data/pdf/AOA0000/AOA0000CE2.pdf?src-supplier=Avnet, ComponentLink2URL=http://industrial.panasonic.com/www-data/pdf/AOA0000/AOA0000CE2.pdf?src-supplier=Avnet, ComponentLink3Description=http://www.jameco.com/Jameco/Products/ProdDS/1987644.pdf?src-supplier=Jameco, ComponentLink3URL=http://www.jameco.com/Jameco/Products/ProdDS/1987644.pdf?src-supplier=Jameco, ComponentLink4Description=https://industrial.panasonic.com/cdbs/www-data/pdf/RDA0000/DMA0000COL11.pdf?src-supplier=Avnet+Asia, ComponentLink4URL=https://industrial.panasonic.com/cdbs/www-data/pdf/RDA0000/DMA0000COL11.pdf?src-supplier=Avnet+Asia, ComponentLink5Description=http://industrial.panasonic.com/www-data/pdf/AOA0000/AOA0000CE2.pdf?src-supplier=Avnet+Europe, ComponentLink5URL=http://industrial.panasonic.com/www-data/pdf/AOA0000/AOA0000CE2.pdf?src-supplier=Avnet+Europe, ComponentLink6Description=http://www.farnell.com/datasheets/1678782.pdf?src-supplier=Element14, ComponentLink6URL=http://www.farnell.com/datasheets/1678782.pdf?src-supplier=Element14, ComponentLink7Description=http://industrial.panasonic.com/www-data/pdf/AOA0000/AOA0000CE2.pdf?src-supplier=Element14, ComponentLink7URL=http://industrial.panasonic.com/www-data/pdf/AOA0000/AOA0000CE2.pdf?src-supplier=Element14, ComponentLink8Description=http://industrial.panasonic.com/www-data/pdf/AOA0000/AOA0000CE2.pdf?src-supplier=Future+Electronics, ComponentLink8URL=http://industrial.panasonic.com/www-data/pdf/AOA0000/AOA0000CE2.pdf?src-supplier=Future+Electronics, ComponentLink9Description=http://www.alliedelec.com/m/d/623f45ff1957d936ff56d46fd1c28cac.pdf?src-supplier=Allied+Electronics, ComponentLink9URL=http://www.alliedelec.com/m/d/623f45ff1957d936ff56d46fd1c28cac.pdf?src-supplier=Allied+Electronics, ComponentLink10Description=http://industrial.panasonic.com/cdbs/www-data/pdf/RDA0000/AOA0000COL19.pdf?src-supplier=Mouser, ComponentLink10URL=http://industrial.panasonic.com/cdbs/www-data/pdf/RDA0000/AOA0000COL19.pdf?src-supplier=Mouser, Factory Pack Quantity=5000, Features="High reliability, Small Size and Light Weight", Height="0.45 mm", Length="1.6 mm", Manufacturer Part Number=ERJ-3EKF1501V, Packaging=Reel, Pricing 1="1=0.1, 10=0.066, 100=0.027, 1000=0.0121, 2500=0.0105 (USD)", Product="Thick Film Resistors SMD", Product Category="Thick Film Resistors", Qualification=AEC-Q200, RoHS=True, Series=ERJ, Stock 1=1002673, Supplier 1=Digi-Key, Termination Style=SMD/SMT, Type="Precision Thick Film Resistors SMD", Unit Weight="0.000071 oz", Width="0.8 mm"